# EAGLE board quahog-6-routed (EAGLE 7.6.0)
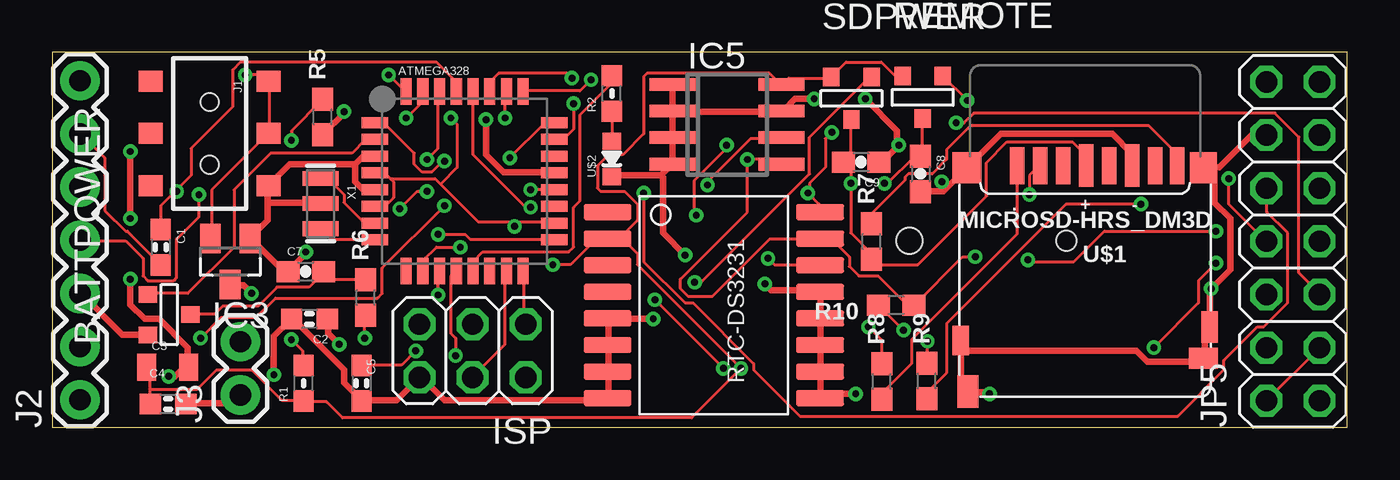
[diagram p0: board, top side]
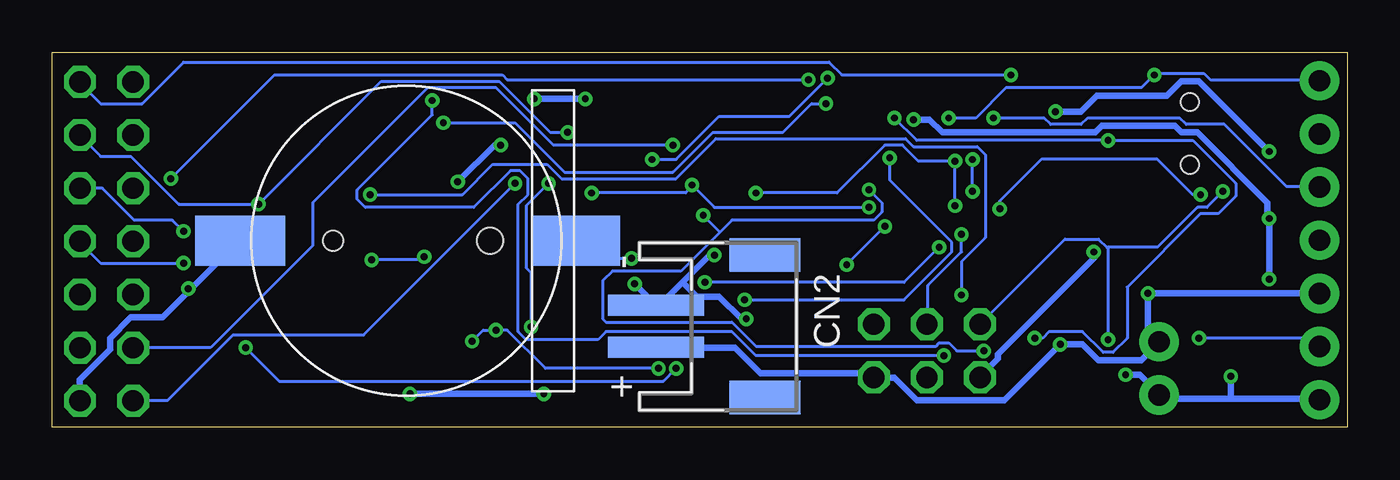
[diagram p1: board, bottom side, seen from below]

Size 61.9 x 17.92 mm. Coordinates in mm from the lower left corner, seen from the top.
Outline: 0,0 61.9,0 61.9,17.92 0,17.92 0,0
Copper layers (1*16): Top 0.0356mm / dielectric 1.5011mm / Bottom 0.0356mm
Design rules "oshpark-2layer": minimum track width 6mil, minimum drill 13mil, track to track 6mil, track to pad 6mil, pad to pad 6mil, via to via 6mil, smd to smd 6mil, copper to edge 15mil, drill to drill 6mil, minimum pad ring 7mil, minimum via ring 7mil, stop-mask expansion 2.5mil, vias tented up to drill 0mil, thermal gap 10mil
Net classes: 1 power: width 0.305 mm

## Footprints (pad centres in the part's own frame; a part is rotated, then mirrored left to right if it is on the bottom)
TQFP32-08 = smd 1.27 x 0.533: 1 -4.293,2.8; 2 -4.293,2; 3 -4.293,1.2; 4 -4.293,0.4; 5 -4.293,-0.4; 6 -4.293,-1.2; 7 -4.293,-2; 8 -4.293,-2.8; 17 4.293,-2.8; 18 4.293,-2; 19 4.293,-1.2; 20 4.293,-0.4; 21 4.293,0.4; 22 4.293,1.2; 23 4.293,2; 24 4.293,2.8 | smd 0.533 x 1.27: 9 -2.8,-4.293; 10 -2,-4.293; 11 -1.2,-4.293; 12 -0.4,-4.293; 13 0.4,-4.293; 14 1.2,-4.293; 15 2,-4.293; 16 2.8,-4.293; 25 2.8,4.293; 26 2,4.293; 27 1.2,4.293; 28 0.4,4.293; 29 -0.4,4.293; 30 -1.2,4.293; 31 -2,4.293; 32 -2.8,4.293
BATTCON_12MM_SMT = smd 2.4 x 4.3: P$1 0,11.96 | smd 2.4 x 4.2: P$2 0,-4.1 | hole 0.95: 0,7.5 | hole 1.25: 0,0
SOT-23 = smd 0.787 x 0.889: 1 0.025,-1.016; 2 -0.94,1.016; 3 0.991,1.016
0603-CAP = smd 1.016 x 0.965: 1 -0.85,0; 2 0.85,0
0805-CAP = smd 0.902 x 1.3: 1 -1,0; 2 1,0
0603-CAP' = smd 1.1 x 1: 1 -0.85,0; 2 0.85,0
JST-PH-2-SMT-RA = smd 1 x 4.6: 1 1,-3.7; 2 -1,-3.7 | smd 1.6 x 3.4: NC1 -3.4,1.5; NC2 3.4,1.5
SOT23 = smd 1 x 1.4: 1 -0.95,-1.1; 2 0.95,-1.1; 3 0,1.1
SO-08 = smd 0.6 x 2.2: 1 -1.905,-2.6; 2 -0.635,-2.6; 3 0.635,-2.6; 4 1.905,-2.6; 5 1.905,2.6; 6 0.635,2.6; 7 -0.635,2.6; 8 -1.905,2.6
2X03 = drill 1.016 octagon: 1 -2.54,-1.27; 2 -2.54,1.27; 3 0,-1.27; 4 0,1.27; 5 2.54,-1.27; 6 2.54,1.27
AYZ0202 = smd 1 x 1.15: 1 -2.5,2.825; 2 0,2.825; 3 2.5,2.825; 4 -2.5,-2.825; 5 0,-2.825; 6 2.5,-2.825 | hole 0.85: 1.5,0; -1.5,0
1X07 = drill 1.016 pad 1.88: 1 0,0; 2 2.54,0; 3 5.08,0; 4 7.62,0; 5 10.16,0; 6 12.7,0; 7 15.24,0
1X02 = drill 1.016 pad 1.88: 1 0,0; 2 2.54,0
2X07 = drill 1.016 octagon: 1 -7.62,-1.27; 2 -7.62,1.27; 3 -5.08,-1.27; 4 -5.08,1.27; 5 -2.54,-1.27; 6 -2.54,1.27; 7 0,-1.27; 8 0,1.27; 9 2.54,-1.27; 10 2.54,1.27; 11 5.08,-1.27; 12 5.08,1.27; 13 7.62,-1.27; 14 7.62,1.27
0603-RES = smd 1.016 x 0.965: 1 -0.85,0; 2 0.85,0
0603-NO = smd 1.1 x 1: 1 -0.85,0; 2 0.85,0
DS3231 = smd 0.762 x 2.286: 1 -4.445,-5.08; 2 -3.175,-5.08; 3 -1.905,-5.08; 4 -0.635,-5.08; 5 0.635,-5.08; 6 1.905,-5.08; 7 3.175,-5.08; 8 4.445,-5.08; 9 4.445,5.08; 10 3.175,5.08; 11 1.905,5.08; 12 0.635,5.08; 13 -0.635,5.08; 14 -1.905,5.08; 15 -3.175,5.08; 16 -4.445,5.08
DM3D = smd 0.7 x 1.75: CD/DAT3 8.15,0.45; CLK 4.85,0.45; CMD 7.05,0.45; DAT0 2.65,0.45; DAT1 1.6,0.45; DAT2 9.25,0.45 | smd 0.8 x 1.5: GND1 0.05,8.15 | smd 0.8 x 1.4: GND2 11.95,8.8 | smd 1.4 x 1.5: GND3 11.65,0.55 | smd 1.3 x 1.5: GND4 0.35,0.55 | smd 1 x 1.55: SW_A 11.6,11.25 | smd 1.4 x 1: SW_B 0.35,9.65 | smd 0.7 x 2.032: VDD 5.95,0.45; VSS 3.75,0.45
0603-LED = smd 0.8 x 0.9: MINUS -0.85,0; PLUS 0.85,0
RESONATOR-SMD = smd 0.7 x 1.7: 1 -1.2,0; 2 0,0; 3 1.2,0

## Placement (x,y rotation side)
ATMEGA328  ATMega-328  [TQFP32-08]  19.71,11.76 0 top
BAT  CR1220  [BATTCON_12MM_SMT]  40.97,8.92 90 bottom
BATTPOWER  FDN340P  [SOT-23]  5.59,5.36 90 top
C1  0.1  [0603-CAP]  5.18,8.61 270 top
C2  1u  [0603-CAP]  12.29,5.18 180 top
C3  10u  [0805-CAP]  5.51,2.87 0 top
C4  0.1  [0603-CAP]  5.54,1.12 0 top
C5  0.1  [0603-CAP]  14.78,2.11 270 top
C7  0.1uF  [0603-CAP']  12.12,7.44 0 top
C8  0.1uF  [0603-CAP']  41.5,12.12 270 top
C9  0.1uF  [0603-CAP']  38.66,12.67 180 top
CN2  [JST-PH-2-SMT-RA]  29.34,4.83 270 bottom
IC3  MCP1703CB  [SOT23]  8.51,7.92 180 top
IC5  24AA128SN  [SO-08]  32.26,14.48 270 top
ISP  [2X03]  20.09,3.66 180 top
J1  AYZ0202  [AYZ0202]  7.52,14.05 270 top
J2  [1X07]  1.32,1.32 90 top
J3  [1X02]  8.99,1.55 90 top
JP5  [2X07]  59.31,8.89 90 top
R1  10k  [0603-RES]  12.01,2.11 90 top
R2  1k5  [0603-RES]  26.75,15.95 90 top
R5  100K  [0603-NO]  12.93,14.83 90 top
R6  100K  [0603-NO]  14.99,6.2 90 top
R7  10K  [0603-NO]  39.17,8.89 90 top
R8  10K  [0603-NO]  39.65,2.18 90 top
R9  1.4K  [0603-NO]  41.81,2.21 90 top
R10  1.4K  [0603-NO]  40.34,5.84 180 top
REMOTE  FDN340P  [SOT-23]  41.58,15.77 0 top
RTC-DS3231  DS3231  [DS3231]  31.62,5.84 270 top
SDPWER  FDN340P  [SOT-23]  38.18,15.72 0 top
U$1  MICROSD-HRS_DM3D  [DM3D]  55.37,12.95 180 top
U$2  LED0603  [0603-LED]  26.75,12.83 90 top
X1  16 MHz  [RESONATOR-SMD]  12.83,10.69 270 top

## Library data of the parts
ATMEGA328 C1-C5 R1 R2 U$2 = LowPowerLab
BAT J1 = SparkFunNew
BATTPOWER REMOTE SDPWER = zetex; OC_FARNELL: unknown; OC_NEWARK: unknown
C7-C9 X1 = SparkFun
CN2 = adafruit
IC3 = linear
IC5 = microchip; MF: MICROCHIP; MPN: 24AA128-I/SN; OC_FARNELL: unknown; OC_NEWARK: 92C6842
ISP JP5 = pinhead
J2 J3 = SparkFun-Connectors
R5-R10 = microbuilder
RTC-DS3231 = _lh-library
U$1 = hrs_DM3D-SF

## Nets
A0: ATMEGA328.23 JP5.5
A1: ATMEGA328.24 JP5.7
A2: ATMEGA328.25 JP5.8
A3: ATMEGA328.26 R5.2 R6.1
A6: ATMEGA328.19
A7: ATMEGA328.22
AREF: ATMEGA328.20 C5.1 JP5.4
D0_RX: ATMEGA328.30 J2.4
D1_TX: ATMEGA328.31 J2.5
D2: ATMEGA328.32 JP5.13
D3: ATMEGA328.1 J2.2 JP5.10
D4: ATMEGA328.2 BATTPOWER.3
D5: ATMEGA328.9
D5/RTC: RTC-DS3231.3
D6: ATMEGA328.10 SDPWER.3
D7: ATMEGA328.11 U$1.CD/DAT3
D8: ATMEGA328.12 REMOTE.3
D9: ATMEGA328.13 R2.2
D10: JP5.6
D10_SS: ATMEGA328.14
D11_MOSI: ATMEGA328.15 ISP.4
D12_MISO: ATMEGA328.16 ISP.1
D13_SCK: ATMEGA328.17 ISP.3
GND [power]: ATMEGA328.3 ATMEGA328.5 ATMEGA328.21 BAT.P$1 C2.2 C3.2 C4.2 C5.2 C7.1 C8.2 C9.1 CN2.2 IC3.1 IC5.1 IC5.2 IC5.3 IC5.4 IC5.7 ISP.6 J1.3 J2.1 J3.1 JP5.1 JP5.12 R5.1 RTC-DS3231.5 RTC-DS3231.6 RTC-DS3231.7 RTC-DS3231.8 RTC-DS3231.9 RTC-DS3231.10 RTC-DS3231.11 RTC-DS3231.12 RTC-DS3231.13 U$1.GND1 U$1.GND2 U$1.GND3 U$1.GND4 U$1.SW_A U$1.SW_B U$1.VSS U$2.MINUS X1.2
MISO: U$1.DAT0
MOSI: U$1.CMD
N$1: ATMEGA328.7 X1.1
N$2: R2.1 U$2.PLUS
N$4: C9.2 R7.1 R8.2 SDPWER.1 U$1.VDD
N$7: C8.1 JP5.2 JP5.3 REMOTE.1
N$15: BATTPOWER.1 C7.2 R6.2
N$16: R7.2 U$1.DAT1
N$18: R8.1 U$1.DAT2
N$20: C1.2 J2.6
N$21: ATMEGA328.8 X1.3
PWR [power]: BATTPOWER.2 C2.1 CN2.1 IC3.3 ISP.2 J2.3 J3.2
RST: ATMEGA328.29 C1.1 ISP.5 R1.2
RTC_BATT: BAT.P$2 RTC-DS3231.14
SCK: U$1.CLK
SCL: ATMEGA328.28 IC5.6 JP5.11 R9.1 RTC-DS3231.16
SDA: ATMEGA328.27 IC5.5 JP5.9 R10.1 RTC-DS3231.15
VBAT [power]: JP5.14
VCC: ATMEGA328.4 ATMEGA328.6 ATMEGA328.18 C3.1 C4.1 IC3.2 IC5.8 J1.1 J1.2 J2.7 R1.1 R9.2 R10.2 REMOTE.2 RTC-DS3231.2 SDPWER.2

## Tracks (layer width: path | path; a pad name or v marks a point on that pad's centre or on a via)
A0  (via drill 0.33)
  Top 0.152: v24.92,15.47 24.92,14.25 24.46,13.79 24,13.79 ATMEGA328.23 | v43.2,14.55 43.59,14.55 44.04,15.01 58.45,15.01 59.59,13.87 59.59,7.39 60.58,6.4 JP5.5
  Bottom 0.152: v24.92,15.47 25.6,15.47 26.98,14.1 30.33,14.1 32.23,12.19 37.41,12.19 39.78,14.55 v43.2,14.55
A1  (via drill 0.33)
  Top 0.152: v21.87,12.88 23.55,14.55 ATMEGA328.24 | v32.08,2.82 v28.8,6.1 | v52.65,3.81 54.79,5.94 54.79,7.01 v55.63,7.85
  Bottom 0.152: v21.87,12.88 21.87,11.81 18.9,8.84 18.9,8.38 21.18,6.1 v28.8,6.1 | v32.08,2.82 32.69,2.21 51.05,2.21 v52.65,3.81 | v55.63,7.85 59.59,7.85 60.58,8.84 JP5.7
A2  (via drill 0.33)
  Top 0.152: v25.76,16.61 25.22,16.08 22.55,16.08 ATMEGA328.25 | v56.24,11.89 56.24,10.67 57.99,8.91 JP5.8
  Bottom 0.152: v25.76,16.61 40.16,16.61 40.39,16.84 51.28,16.84 v56.24,11.89
A3  (via drill 0.33)
  Top 0.152: v14.94,4.27 14.94,5.33 R6.1 | v11.43,13.72 11.43,14.17 12.88,15.62 R5.2 | v21.64,14.78 21.64,16 ATMEGA328.26
  Bottom 0.152: v14.94,4.27 14.55,4.27 14.25,4.57 12.65,4.57 11.66,3.58 11.2,3.58 10.52,4.27 10.52,6.71 7.01,10.21 6.17,10.21 5.33,11.05 5.33,11.66 7.39,13.72 v11.43,13.72 20.57,13.72 v21.64,14.78
AREF  (via drill 0.33)
  Top 0.152: v17.37,3.66 16.69,2.97 14.78,2.97 C5.1 | v22.86,11.35 ATMEGA328.20 | v32.23,13.49 32.23,13.34 30.71,11.81 30.71,10.21 v30.79,10.13
  Bottom 0.152: v17.37,3.66 18.67,3.66 19.05,4.04 19.51,4.04 19.66,3.89 28.27,3.89 29.41,5.03 35.43,5.03 35.59,5.18 35.59,7.01 35.13,7.47 31.85,7.47 29.98,9.34 | 29.98,9.34 29.41,9.91 22.63,9.91 22.25,10.29 22.25,10.74 v22.86,11.35 | JP5.4 54.33,3.81 49.45,8.69 49.45,10.74 43.97,16.23 40.69,16.23 37.95,13.49 v32.23,13.49 | 29.98,9.34 v30.79,10.13
D0_RX  (via drill 0.33)
  Top 0.152: v17.91,12.8 18.44,13.34 18.44,16 ATMEGA328.30 | v17.91,11.28 17.45,11.28 v16.61,10.44 | v7.01,11.12 7.01,10.06 5.94,8.99 5.94,7.16 5.79,7.01 4.57,7.01 4.34,7.24 4.34,8.08 3.5,8.91 1.37,8.91 J2.4
  Bottom 0.152: v17.91,11.28 v17.91,12.8 | v16.61,10.44 16.61,10.82 14.63,12.8 9.07,12.8 7.39,11.12 v7.01,11.12
D1_TX  (via drill 0.33)
  Top 0.152: v16.92,14.78 17.68,15.54 17.68,16 ATMEGA328.31
  Bottom 0.152: v16.92,14.78 14.48,14.78 14.17,14.48 12.72,14.48 12.42,14.78 8,14.78 7.7,14.48 5.87,14.48 2.9,11.51 1.37,11.51 J2.5
D2  (via drill 0.33)
  Top 0.152: v16.08,16.84 16.84,16.08 ATMEGA328.32
  Bottom 0.152: v16.08,16.84 24.16,16.84 24.77,17.45 55.63,17.45 57.61,15.47 59.59,15.47 60.58,16.46 JP5.13
D3  (via drill 0.33)
  Top 0.152: v18.74,12.72 18.67,12.72 18.14,12.19 17.68,12.19 17.3,12.57 17.3,13.11 15.85,14.55 15.47,14.55 ATMEGA328.1 | v18.74,10.59 15.77,7.62 15.77,6.4 15.54,6.17 10.67,6.17 9.75,5.26 8.08,5.26 v7.09,4.27 | v28.27,11.2 28.27,7.92 30.25,5.94 30.63,5.94 33.53,3.05 33.53,2.74 35.74,0.53 53.8,0.53 56.01,2.74 56.01,3.2 57.61,4.8 57.91,4.8 59.05,5.94 59.05,9.3 58.06,10.29 58.06,11.43 JP5.10
  Bottom 0.152: v18.74,10.59 v18.74,12.72 20.5,12.72 21.26,13.49 22.1,13.49 24.38,11.2 v28.27,11.2 | v7.09,4.27 1.75,4.27 1.37,3.89 J2.2
D4
  Top 0.152: BATTPOWER.3 4.57,6.4 6.48,6.4 8.69,8.61 8.69,11.35 10.44,13.11 14.33,13.11 14.94,13.72 15.39,13.72 ATMEGA328.2
D6  (via drill 0.33)
  Top 0.152: v30.71,6.93 31.01,6.93 36.2,12.12 36.2,13.87 39.01,16.69 39.17,16.69 SDPWER.3 | v19.51,8.61 18.36,8.61 17.76,8 17.76,7.47 ATMEGA328.10
  Bottom 0.152: v30.71,6.93 21.18,6.93 v19.51,8.61
D7  (via drill 0.33)
  Top 0.152: v18.44,6.33 18.44,7.47 ATMEGA328.11 | v46.71,11.12 46.71,12.04 47.17,12.5 U$1.CD/DAT3
  Bottom 0.152: v18.44,6.33 18.44,7.92 17.3,9.07 17.3,13.03 17.68,13.41 20.73,13.41 21.11,13.79 30.18,13.79 32.08,11.89 37.57,11.89 38.25,12.57 40.84,12.57 42.29,11.12 v46.71,11.12
D8  (via drill 0.33)
  Top 0.152: v43.74,15.62 REMOTE.3 | v19.28,3.43 19.28,4.27 19.05,4.5 19.05,7.24 19.28,7.47 ATMEGA328.12
  Bottom 0.152: v43.74,15.62 43.74,14.94 47.32,11.35 47.32,10.9 46.94,10.52 41.76,10.52 40.01,12.27 39.55,12.27 39.17,11.89 39.17,11.12 39.62,10.67 39.62,4.57 39.24,4.19 35.81,4.19 35.43,4.57 29.41,4.57 28.27,3.43 v19.28,3.43
D9
  Top 0.152: R2.2 26.75,16.46 25.22,14.94 25.22,10.82 24.92,10.52 24.92,8.61 24.69,8.38 20.57,8.38 20.12,7.92 ATMEGA328.13
D11_MOSI
  Top 0.152: ATMEGA328.15 21.64,7.47 21.64,3.96 20.12,2.44 ISP.4
D12_MISO
  Top 0.152: ATMEGA328.16 22.55,7.47 22.55,5.03 22.63,4.95 ISP.1
D13_SCK  (via drill 0.33)
  Top 0.152: v18.44,9.22 19.74,9.22 19.96,8.99 24,8.99 ATMEGA328.17
  Bottom 0.152: v18.44,9.22 18.44,8.38 20.04,6.78 20.04,4.95 ISP.3
GND  (via drill 0.33)
  Top 0.305: 14.48,12.57 14.48,11.73 14.78,11.43 15.39,11.43 ATMEGA328.5 | 14.48,12.57 14.86,12.95 15.39,12.95 ATMEGA328.3 | 10.29,10.74 10.29,9.91 9.53,9.14 IC3.1 9.53,8.99 11.05,7.47 11.2,7.47 C7.1 11.35,7.54 12.12,8.31 v12.12,8.38 | 10.29,10.74 10.29,11.51 J1.3 10.44,11.66 11.35,12.57 14.48,12.57 | 10.29,10.74 12.8,10.74 X1.2 | C4.2 6.4,1.14 8.61,1.14 8.99,1.52 J3.1 | v13.94,15.09 13.94,15.01 12.95,14.02 R5.1 | v3.73,9.98 v3.73,13.18 | v3.73,7.09 3.73,5.87 4.42,5.18 5.11,5.18 6.48,3.81 6.48,2.9 C3.2 6.32,2.9 5.87,2.44 v5.56,2.44 | v20.73,14.71 20.73,13.03 21.56,12.19 24,12.19 ATMEGA328.21 | v10.59,2.52 10.59,4.34 11.35,5.11 C2.2 11.51,5.18 13.94,2.74 13.94,2.13 14.71,1.37 C5.2 14.78,1.29 16.46,1.29 ISP.6 17.68,2.36 18.74,1.29 26.44,1.29 RTC-DS3231.8 26.59,1.45 26.59,2.67 RTC-DS3231.7 26.59,2.74 26.59,3.89 RTC-DS3231.6 26.59,4.04 26.59,5.18 RTC-DS3231.5 26.75,5.18 v28.73,5.18 | JP5.12 57.99,13.95 57.3,13.95 55.78,12.42 55.09,12.42 U$1.GND4 55.55,12.34 55.55,10.74 56.31,9.98 56.31,7.54 v55.4,6.63 55.32,6.55 55.32,4.95 U$1.GND1 55.09,4.57 55.09,3.35 U$1.SW_B 54.86,3.28 54.71,3.12 52.35,3.12 51.82,3.66 43.51,3.66 U$1.GND2 43.43,4.12 43.43,2.06 43.74,1.75 U$1.SW_A 43.89,1.68 44.73,1.68 v44.81,1.6 | 42.79,11.47 43.66,12.34 U$1.GND3 43.82,12.5 45.34,14.02 50.67,14.02 51.59,13.11 51.59,12.57 U$1.VSS | 42.79,11.47 42.6,11.28 41.53,11.28 C8.2 | 42.79,11.47 v42.52,11.73 | C9.1 39.55,12.72 39.7,12.72 v40.46,13.49 40.39,13.56 40.39,14.17 v38.86,15.7 | 29.11,12.04 26.75,12.04 U$2.MINUS | 29.11,12.04 29.64,12.57 IC5.4 29.64,12.65 29.64,13.79 IC5.3 29.64,13.95 29.64,15.09 IC5.2
  Top 0.305: IC5.1 29.64,16.38 29.64,15.24 IC5.2 | IC5.2 29.79,15.09 34.82,15.09 IC5.7 34.98,15.16 35.51,15.7 v36.42,15.7 | v34.06,6.86 34.37,6.55 36.58,6.55 RTC-DS3231.13 36.73,6.48 36.73,5.33 RTC-DS3231.12 36.73,5.18 36.73,4.04 RTC-DS3231.11 36.73,3.89 36.73,2.74 RTC-DS3231.10 36.73,2.67 36.73,1.45 RTC-DS3231.9 36.8,1.6 v38.41,1.6 | v30.25,8.23 29.19,9.3 29.19,11.96 29.11,12.04
  Bottom 0.305: v12.12,8.38 12.12,8.08 16.69,3.5 16.69,3.28 17.53,2.44 ISP.6 | 5.56,1.37 8.84,1.37 8.99,1.52 J3.1 9.07,1.68 9.91,2.52 v10.59,2.52 | 5.56,1.37 1.37,1.37 J2.1 | v13.94,15.09 12.72,15.09 11.96,15.85 8.61,15.85 7.92,16.54 7.09,16.54 v3.73,13.18 | v3.73,7.09 v3.73,9.98 3.81,10.06 3.81,10.74 7.16,14.1 7.92,14.1 8.23,14.4 11.74,14.4 12.04,14.1 19.35,14.1 19.96,14.71 v20.73,14.71 | v5.56,2.44 5.56,1.37 | JP5.1 60.58,2.29 59.13,3.73 59.13,4.27 58.14,5.26 56.62,5.26 55.32,6.55 | 55.32,6.55 52.96,8.91 BAT.P$1 | v55.4,6.63 55.32,6.55 | v40.46,13.49 40.77,13.49 v42.52,11.73 | v34.06,6.86 33.07,5.87 CN2.2 32.92,5.79 31.77,6.93 | v30.25,8.23 30.48,8.23 31.77,6.93 | v36.42,15.7 v38.86,15.7 | v38.41,1.6 v44.81,1.6 | v28.73,5.18 28.96,5.18 30.02,6.25 31.09,6.25 31.77,6.93
N$1
  Top 0.152: ATMEGA328.7 15.39,9.83 14.86,9.83 13.94,10.74 13.94,11.12 13.18,11.89 12.88,11.89 X1.1
N$2
  Top 0.152: R2.1 U$2.PLUS
N$4  (via drill 0.33)
  Top 0.152: SDPWER.1 38.18,14.71 38.18,13.03 37.87,12.72 C9.2 37.87,12.65 38.18,12.34 v38.18,11.66 38.18,9.3 39.17,8.31 R7.1 39.17,8 39.4,7.77 41.38,7.77 44.65,11.05 44.65,12.65 45.64,13.64 48.77,13.64 49.38,13.03 49.38,12.57 U$1.VDD | v39.01,4.8 39.62,4.19 39.62,3.05 R8.2
  Bottom 0.152: v39.01,4.8 39.01,7.39 39.24,7.62 39.24,10.59 v38.18,11.66
N$7  (via drill 0.33)
  Top 0.152: REMOTE.1 41.61,13.11 41.53,13.03 C8.1 41.45,12.95 41.22,12.95 39.93,11.66 v39.78,11.66 | JP5.2 JP5.3
  Bottom 0.152: v39.78,11.66 47.02,4.42 53.26,4.42 56.39,1.29 57.99,1.29 JP5.2
N$15
  Top 0.152: BATTPOWER.1 6.63,5.41 7.77,5.41 8.15,5.79 9.83,5.79 10.74,6.71 12.27,6.71 12.95,7.39 C7.2 13.03,7.39 13.33,7.09 14.94,7.09 R6.2
N$16
  Top 0.152: R7.2 39.17,10.21 40.77,11.81 40.77,11.96 40.92,12.12 42.06,12.12 42.75,12.8 42.75,13.26 43.89,14.4 52.43,14.4 53.72,13.11 53.72,12.57 U$1.DAT1
N$18
  Top 0.152: R8.1 39.7,1.37 39.7,1.68 41.07,3.05 41.07,4.19 46.1,9.22 46.1,12.5 U$1.DAT2
N$20
  Top 0.152: C1.2 5.18,7.77 3.58,9.37 3.5,9.37 2.52,10.36 2.52,12.88 1.37,14.02 J2.6
N$21
  Top 0.152: ATMEGA328.8 15.39,8.99 13.33,8.99 12.88,9.45 X1.3
PWR  (via drill 0.33)
  Top 0.305: BATTPOWER.2 3.35,4.42 1.37,6.4 J2.3 | v13.72,3.96 13.18,4.5 13.18,5.18 C2.1 | v9.53,6.4 9.14,6.78 8.53,6.78 IC3.3
  Bottom 0.305: J2.3 v9.53,6.4 9.53,4.65 9.07,4.19 J3.2 8.99,4.04 9.83,3.2 11.89,3.2 12.65,3.96 v13.72,3.96 16.38,1.29 20.57,1.29 21.64,2.36 22.63,2.36 ISP.2 22.71,2.52 22.78,2.59 28.04,2.59 29.26,3.81 33,3.81 CN2.1
RST  (via drill 0.33)
  Top 0.152: v11.43,4.19 11.96,3.66 11.96,2.97 R1.2 | C1.1 5.18,10.59 5.91,11.32 | 5.91,11.32 6.63,12.04 6.63,13.34 8.61,15.32 8.61,17.07 8.99,17.45 18.36,17.45 19.28,16.54 19.28,16.08 ATMEGA328.29 | v5.94,11.28 5.91,11.32
  Bottom 0.152: v11.43,4.19 11.43,8.53 11.47,8.57 | 11.47,8.57 11.89,8.99 13.49,8.99 ISP.5 | v5.94,11.28 6.71,10.52 7.16,10.52 9.07,8.61 11.43,8.61 11.47,8.57
RTC_BATT  (via drill 0.33)
  Top 0.152: v34.21,8.08 34.52,7.77 36.65,7.77 RTC-DS3231.14
  Bottom 0.152: v34.21,8.08 35.97,8.08 36.8,8.91 BAT.P$2
SCL  (via drill 0.33)
  Top 0.152: v22.86,10.52 22.63,10.52 20.12,13.03 20.12,16 ATMEGA328.28 | v31.32,11.58 31.32,11.73 33.38,13.79 34.82,13.79 IC5.6 | RTC-DS3231.16 36.65,10.29 36.65,10.67 v36.12,11.2 36.2,11.2 36.2,11.66 36.96,12.42 36.96,13.79 v37.26,14.1 | v52.05,10.67 48.46,10.67 42.75,4.95 42.75,2.59 41.83,1.68 41.83,1.37 R9.1
  Bottom 0.152: v22.86,10.52 30.25,10.52 v31.32,11.58 31.32,11.51 31.62,11.2 v36.12,11.2 | JP5.11 60.58,13.95 59.59,12.95 58.14,12.95 55.85,10.67 v52.05,10.67 46.18,16.54 40.54,16.54 38.1,14.1 v37.26,14.1
SDA  (via drill 0.33)
  Top 0.152: v24.84,16.69 24.61,16.92 21.34,16.92 20.95,16.54 20.95,16.08 ATMEGA328.27 | IC5.5 34.82,12.57 34.59,12.8 v33.22,12.8 33.22,10.29 30.02,7.09 30.02,6.63 30.4,6.25 31.55,6.25 34.29,8.99 36.65,8.99 RTC-DS3231.15 36.73,8.99 37.26,8.99 38.1,8.15 38.1,7.7 38.56,7.24 39.47,7.24 40.84,5.87 41.15,5.87 R10.1 41.22,5.87 43.51,8.15 v44.12,8.15 | v55.63,9.37 50.29,9.37 48.84,7.92 46.71,7.92 v46.63,8
  Bottom 0.152: v24.84,16.69 26.67,14.86 30.02,14.86 32.08,12.8 v33.22,12.8 | JP5.9 59.51,11.43 57.99,9.91 56.16,9.91 v55.63,9.37 | v46.63,8 44.27,8 v44.12,8.15
VCC  (via drill 0.33)
  Top 0.152: 16.19,11.85 15.93,12.12 15.47,12.12 ATMEGA328.4 | 16.19,11.85 16.31,11.73 16.31,10.97 15.93,10.59 15.47,10.59 ATMEGA328.6 | 22.1,9.83 20.34,9.83 18.55,11.62 | 22.1,9.83 24,9.83 ATMEGA328.18 | 18.55,11.62 18.29,11.89 16.23,11.89 16.19,11.85 | IC3.2 7.62,9.07 7.62,11.35 10.29,14.02 J1.2 10.36,14.1 10.36,16.54 J1.1 10.29,16.61 10.06,16.84 v9.22,16.84 | 18.55,11.62 19.35,12.42 19.35,14.48 v19.05,14.78 | 4.65,1.83 4.65,2.74 4.57,2.82 C3.1 | 4.65,1.83 4.65,1.14 C4.1 | 4.65,1.83 6.93,1.83 7.85,2.74 9.53,2.74 10.97,1.29 11.96,1.29 R1.1 12.04,1.22 13.11,1.22 13.87,0.46 30.56,0.46 v32.92,2.82 27.97,7.77 27.97,8.31 27.2,9.07 RTC-DS3231.2 | v40.69,4.65 39.55,5.79 R10.2 | v41.83,4.12 41.83,3.12 R9.2 | REMOTE.2 40.62,16.84 40.23,16.84 39.62,17.45 37.95,17.45 SDPWER.2 37.19,16.69 35.2,16.69 34.9,16.38 IC5.8 34.82,16.38 34.29,16.92 28.42,16.92 28.27,16.76 28.27,14.02 27.28,13.03 26.59,13.03 26.06,12.5 26.06,11.43 26.21,11.28 27.36,11.28 27.97,10.67 27.97,9.91 27.13,9.07 26.59,9.07 RTC-DS3231.2 | v22.1,9.6 22.1,9.83 | v23.93,7.77 24.77,7.77 25.98,8.99 26.52,8.99 RTC-DS3231.2
  Bottom 0.152: J2.7 1.37,16.61 6.55,16.61 6.86,16.92 9.14,16.92 v9.22,16.84 9.83,16.23 16.31,16.23 17.76,14.78 v19.05,14.78 | v41.83,4.12 41.3,4.65 v40.69,4.65 40.16,4.65 38.33,2.82 v32.92,2.82 | v23.93,7.77 v22.1,9.6